# Altium PCB PCB1.PcbDoc
Units mm, origin at the board's own origin, x right, y up, seen from the top; angles counter-clockwise.
Board outline 33.4 x 93.22 mm, 2 copper layers (Top Layer, Bottom Layer); 31 components, 27 nets, 114 pads, 40 vias.
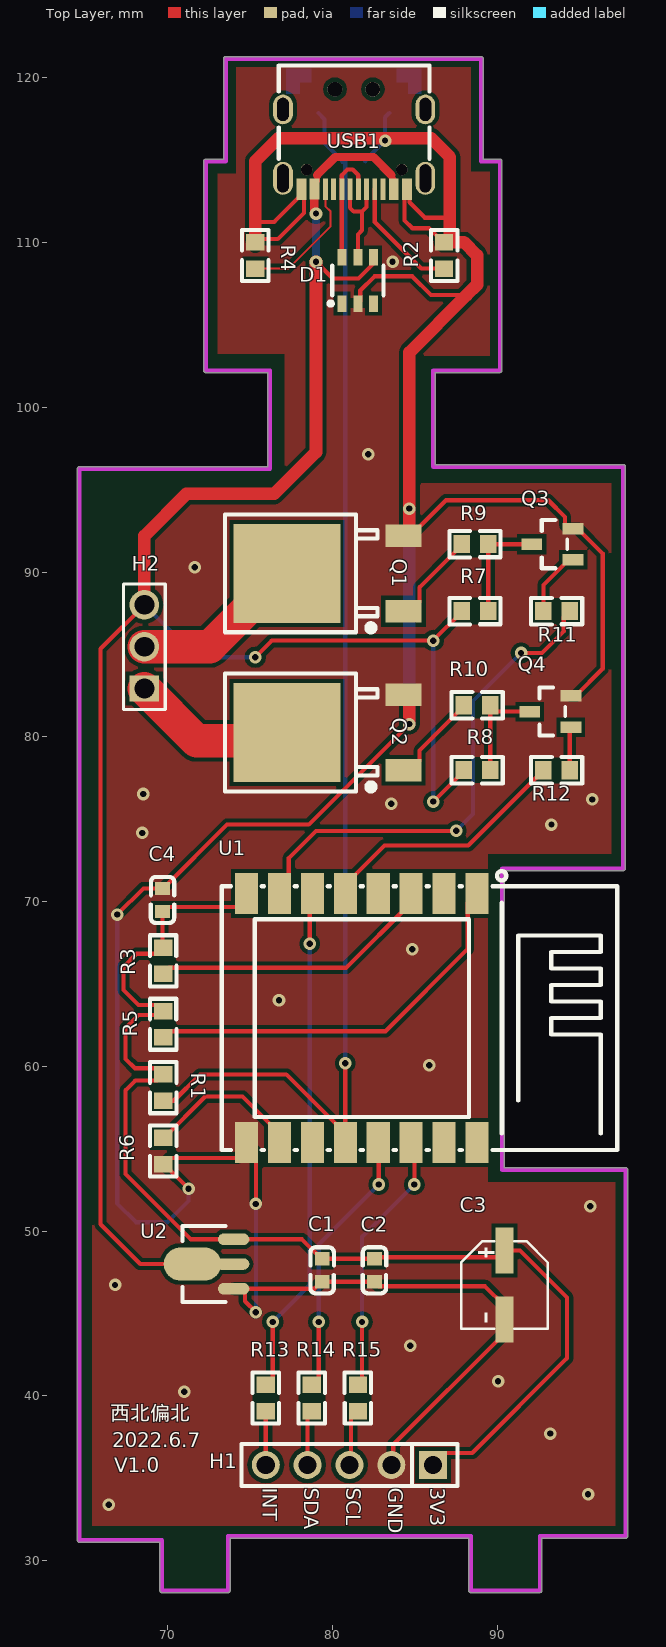
[diagram p0: Top Layer view]
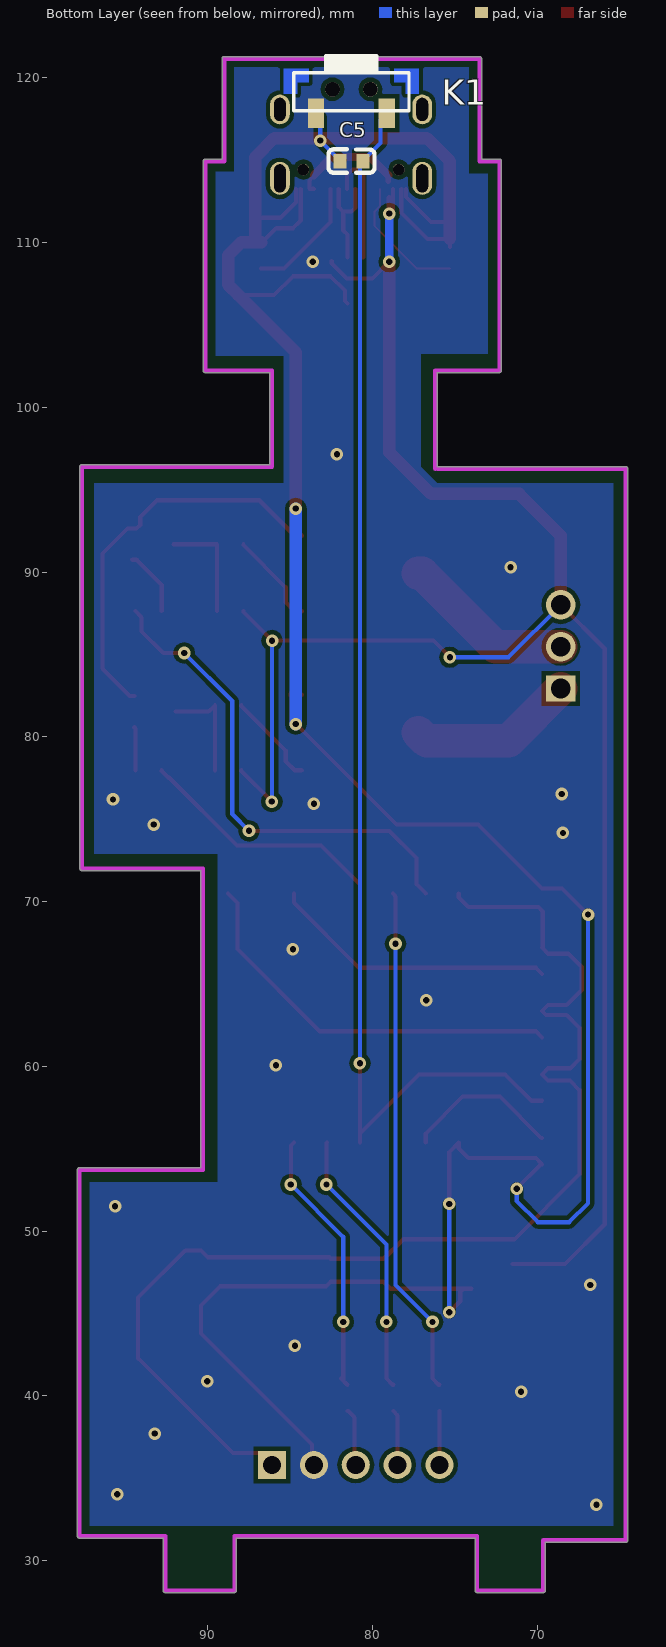
[diagram p1: Bottom Layer view, seen from below]
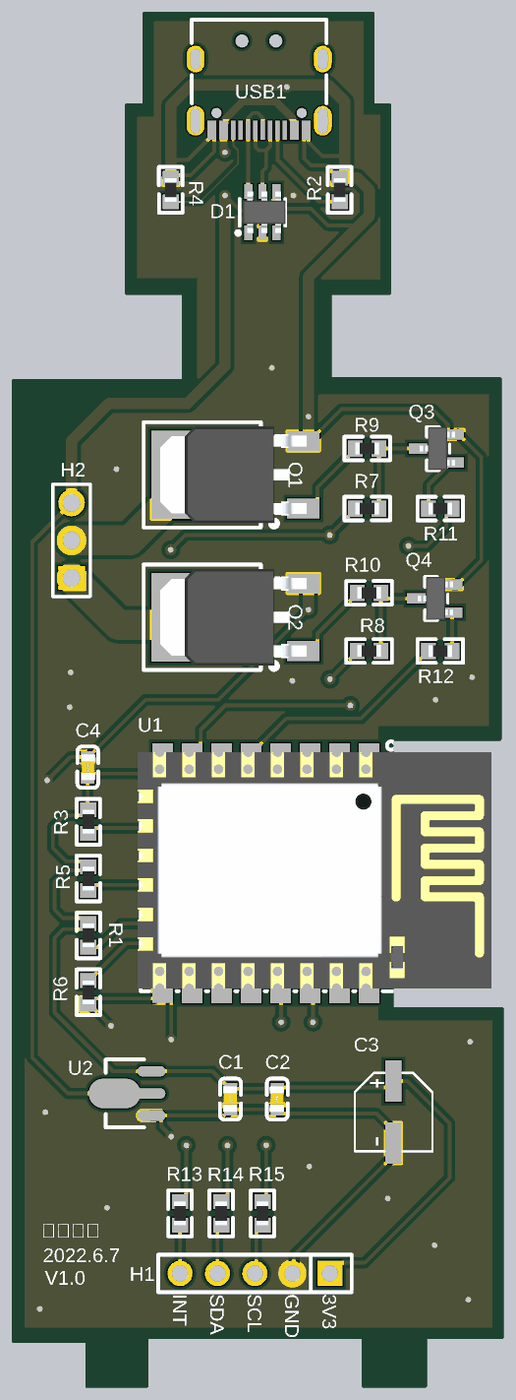
[diagram p2: 3D render of the assembled board from above, using the file's embedded part models]

## Layer stack, top to bottom
Top Solder: solder mask 0.0102, Solder Resist, Dk 3.5
Top Layer: signal copper 0.0356
Dielectric 1: dielectric 0.32, FR-4, Dk 4.8
Bottom Layer: signal copper 0.0356
Bottom Solder: solder mask 0.0102, Solder Resist, Dk 3.5

## Board outline
64.643,31.115 69.516,31.115 69.516,28.194 ccw(c69.643,28.194) 69.643,28.067 73.66,28.067 ccw(c73.66,28.194) 73.787,28.194 73.787,31.369 88.265,31.369 88.265,28.194 ccw(c88.392,28.194) 88.392,28.067 92.583,28.067 ccw(c92.583,28.194) 92.71,28.194 92.71,31.369 97.79,31.369 ccw(c97.79,31.496) 97.917,31.496 97.917,53.721 ccw(c97.79,53.721) 97.79,53.848 90.424,53.848 90.424,71.882 97.643,71.882 ccw(c97.643,72.009) 97.77,72.009 97.77,96.393 ccw(c97.643,96.393) 97.643,96.52 86.233,96.52 86.233,102.108 90.154,102.108 ccw(c90.154,102.235) 90.281,102.235 90.281,114.935 ccw(c90.154,114.935) 90.154,115.062 89.138,115.062 89.138,121.158 ccw(c89.011,121.158) 89.011,121.285 73.517,121.285 ccw(c73.517,121.158) 73.39,121.158 73.39,115.062 72.311,115.062 ccw(c72.311,114.935) 72.184,114.935 72.184,102.235 ccw(c72.311,102.235) 72.311,102.108 76.073,102.108 76.073,96.401 64.643,96.401 ccw(c64.643,96.274) 64.516,96.274 64.516,31.242 ccw(c64.643,31.242)

## Design rules (kind name [scope] priority, off if disabled: settings)
Clearance [All] p1: gap=0.254 ignorepadtopadclearanceinfootprint=FALSE except(0: Arc-Hole Track-Hole SMDPad-Hole THPad-Hole Via-Hole Fill-Hole Poly-Hole Region-Hole Text-Hole)
PolygonConnect [All] p1: connectstyle=Direct reliefconductorwidth=0.254 reliefentries=4 polygonreliefangle="90 Angle" airgapwidth=0.254
RoutingVias [All] p1: holewidth=0.381 width=0.635 viastyle="Through Hole" minholewidth=0.711 minwidth=1.27 maxholewidth=0.711 maxwidth=1.27
SolderMaskExpansion [All] p1: expansion=0.102
Width [All] p1: maxlimit=2.032 minlimit=0.127 preferedwidth=0.254
30 further rules are at their usual default settings.

## Components (designator, comment, footprint, x,y, rotation, side; value= is the part's Value field where it differs from the comment)
C1 "2.2u" C0603 79.375,47.625 r90 top
C2 "10u" C0603 82.55,47.625 r90 top
C3 "220uF" CAP-SMD_BD5.0-L5.3-W5.3-FD 90.424,46.736 r270 top
C4 "0.1u" C0603 69.674,70.104 r270 top
C5 "1u" C0603 81.28,114.935 r180 bottom
D1 "SRV05-4_C384887" SOT-23-6_L2.9-W1.6-P0.95-LS2.8-BR 81.534,107.696 r270 top
H1 "PAJ7620U2" HDR-TH_5P-P2.54-V-M 81.026,35.814 r180 top
H2 "OUTPUT" HDR-TH_3P-P2.54-V-M-1 68.58,85.471 r90 top
K1 "TS-1188E" "SMD SWITCH 7X3.6X2.7" 81.292,119.006 r0 bottom
Q1 "IRFR1205TRPBF" TO-252-2_L6.5-W6.1-P4.58-LS10.0-TR 80.772,89.916 r270 top
Q2 "IRFR1205TRPBF" TO-252-2_L6.5-W6.1-P4.58-LS10.0-TR 80.772,80.264 r270 top
Q3 "S8050" SOT-23(SOT-23-3) 93.345,91.694 r90 top
Q4 "S8050" SOT-23(SOT-23-3) 93.218,81.534 r90 top
R1 "10k" R0603 69.723,58.712 r270 top
R2 "5.1k" R0603 86.773,109.22 r270 top
R3 "10k" R0603 69.723,66.409 r90 top
R4 "5.1k" R0603 75.311,109.22 r90 top
R5 "10k" R0603 69.723,62.56 r90 top
R6 "10k" R0603 69.723,54.864 r270 top
R7 "5.1k" R0603 88.647,87.63 r180 top
R8 "5.1k" R0603 88.773,77.978 r180 top
R9 "1k" R0603 88.646,91.694 r0 top
R10 "1k" R0603 88.772,81.915 r0 top
R11 "100k" R0603 93.599,87.63 r180 top
R12 "100k" R0603 93.599,77.973 r0 top
R13 "22R" R0603 75.946,39.878 r90 top
R14 "22R" R0603 78.74,39.878 r90 top
R15 "22R" R0603 81.534,39.878 r90 top
U1 "ESP-12S" WIFIM-SMD_ESP-12F-ESP8266MOD 81.122,62.934 r180 top
U2 "HT7833" SOT-89_L4.5-W2.5-P1.50-LS4.2-BR 72.751,48.006 r0 top
USB1 "KH-TYPE-C-16P" USB-C-SMD_KH-TYPE-C-16P 81.311,115.662 r180 top

## Footprints (in the part's own frame and the unit in brackets; to place one, negate y for a bottom-side part, rotate by r counter-clockwise, add the part's x,y. Pads: shape width x height; smd on the part's side, far side on the other; paste and mask are expansions set on the pad)
C0603 [mm]
  rect 0.8x0.9 smd: 1(-0.7,0) 2(0.7,0)
  silkscreen extent -1.4,-0.7 1.4,0.72, body extent -0.88,-0.44 0.88,0.51, height 0.87
CAP-SMD_BD5.0-L5.3-W5.3-FD [mm]
  rect 2.8x1.1 smd: 1(-2.1,0) 2(2.1,0)
  silkscreen extent -2.66,-2.62 2.66,2.65
HDR-TH_3P-P2.54-V-M-1 [mm]
  rect 1.575x1.8 hole 1.2: 1(-2.54,0)
  round 1.8 hole 1.2: 2(0,0) 3(2.54,0)
  silkscreen extent -3.81,-1.27 3.81,1.27
HDR-TH_5P-P2.54-V-M [mm]
  rect 1.7x1.7 hole 1.1: 1(-5.08,0)
  round 1.7 hole 1.1: 2(-2.54,0) 3(0,0) 4(2.54,0) 5(5.08,0)
  silkscreen extent -6.56,-1.27 6.56,1.27
R0603 [mm]
  rect 1x1.1 smd: 1(-0.8,0) 2(0.8,0)
  silkscreen extent -1.55,-0.8 1.55,0.81, body extent -0.8,-0.4 0.8,0.4, height 0.55
"SMD SWITCH 7X3.6X2.7" [mm]
  rect 1x1.8 smd: 1(-2.149,1.15) 2(2.147,1.15)
  round 0 smd: S1(-3.365,-0.795) S2(3.363,-0.803)
  round 0.9 hole 0.9 unplated: ""(-1.151,-0.3) ""(1.151,-0.3)
  Top Layer region: 2.597,-0.735 3.298,-0.735 3.298,-0.034 4.098,-0.034 4.098,-1.535 2.597,-1.535
  Top Layer region: -3.298,-0.031 -3.298,-0.732 -2.597,-0.732 -2.597,-1.532 -4.099,-1.532 -4.099,-0.031
  silkscreen extent -3.5,-2.35 3.5,1
SOT-23(SOT-23-3) [mm]
  rect 0.7x1.25 smd: 1(-0.95,-1.25) 2(0.95,-1.25) 3(0,1.25)
  silkscreen extent -1.46,-0.9 1.46,0.65, body extent -1.45,-1.26 1.45,1.14, height 1.15
SOT-23-6_L2.9-W1.6-P0.95-LS2.8-BR [mm]
  rect 1x0.55 smd: 1(1.4,-0.95) 2(1.4,0) 3(1.4,0.95) 4(-1.4,0.95) 5(-1.4,0) 6(-1.4,-0.95)
  silkscreen extent -0.9,-1.78 1.52,1.55, body extent -1.4,-1.32 1.4,1.58, height 1.45
SOT-89_L4.5-W2.5-P1.50-LS4.2-BR [mm]
  oval 1.9x0.7 smd: 1(1.25,-1.5) 3(1.25,1.5)
  oval 3.5x2 smd: 2(-1.25,0)
  oval 2.1x0.7 smd: 2(1.151,0)
  silkscreen extent -1.85,-2.3 0.75,2.3
TO-252-2_L6.5-W6.1-P4.58-LS10.0-TR [mm]
  rect 1.35x2.2 smd: 1(2.29,3.533) 3(-2.29,3.533)
  rect 6x6.5 smd: 4(0,-3.533)
  silkscreen extent -3.57,-7.3 3.57,1.95, body extent -3.27,-6.16 3.27,3.75, height 2.51
USB-C-SMD_KH-TYPE-C-16P [mm]
  oval 1.2x2 hole 0.7 slot 1.7 at 90 deg: 1(-4.32,1.765) 2(4.32,1.765)
  oval 1.2x1.8 hole 0.7 slot 1.4 at 90 deg: 3(-4.32,-2.415) 4(4.32,-2.415)
  rect 0.3x1.3 smd: A1(-3.35,2.415) A4(-2.55,2.415) A5(-1.25,2.415) A6(-0.25,2.415) A7(0.25,2.415) A8(1.25,2.415) A9(2.55,2.415) A12(3.35,2.415) B1(3.05,2.415) B4(2.25,2.415) B5(1.75,2.415) B6(0.75,2.415) B7(-0.75,2.415) B8(-1.75,2.415) B9(-2.25,2.415) B12(-3.05,2.415)
  round 0.7 hole 0.7 unplated: ""(-2.89,1.235) ""(2.89,1.235)
  silkscreen extent -4.57,-5.08 4.57,0.57
WIFIM-SMD_ESP-12F-ESP8266MOD [mm]
  rect 1.4x2.5 smd: 1(-7.651,-7.551) 2(-5.651,-7.551) 3(-3.651,-7.551) 4(-1.651,-7.551) 5(0.349,-7.551) 6(2.349,-7.551) 7(4.349,-7.551) 8(6.349,-7.551) 9(6.349,7.549) 10(4.349,7.55) 11(2.349,7.551) 12(0.349,7.551) 13(-1.651,7.55) 14(-3.651,7.551) 15(-5.651,7.55) 16(-7.651,7.551)
  silkscreen extent -16.15,-8.92 7.85,8, body extent -15.94,-8.19 8.06,7.81, height 3

## Part data
C3: BOM_JLCPCB Part Class="Extended Part", BOM_Manufacturer=PANASONIC, BOM_Manufacturer Part=EEEFT0J221AR, BOM_Supplier=LCSC, BOM_Supplier Part=C336271, Contributor=LCSC, nameAlias=Capacitance, spicePre=C, spiceSymbolName=EEEFT0J221AR
D1: BOM_Manufacturer=Leiditech, BOM_Manufacturer Part=SRV05-4, BOM_Paste Type=expand, BOM_Supplier=LCSC, BOM_Supplier Part=C384887, Contributor=LCSC, spicePre=D, spiceSymbolName=SRV05-4_C384887
H1: library part KH-2.54PH180-1X5P-L11.5, BOM_JLCPCB Part Class="Extended Part", BOM_Manufacturer=kinghelm(金航标), BOM_Manufacturer Part=KH-2.54PH180-1X5P-L11.5, BOM_Supplier=LCSC, BOM_Supplier Part=C2932699, Contributor=LCSC, spicePre=H, spiceSymbolName=KH-2.54PH180-1X5P-L11.5
H2: library part 68000-103HLF, BOM_JLCPCB Part Class="Extended Part", BOM_Manufacturer="Amphenol ICC", BOM_Manufacturer Part=68000-103HLF, BOM_Supplier=LCSC, BOM_Supplier Part=C168677, Contributor=LCSC, spicePre=H, spiceSymbolName=68000-103HLF
K1: BOM_Manufacturer=ReliaPro, BOM_Manufacturer Part="3*6*3.5 Side press  High temperature", BOM_Supplier=LCSC, BOM_Supplier Part=C37327, catid=20, spicePre=K
Q1 Q2: BOM_JLCPCB Part Class="Extended Part", BOM_Manufacturer=Infineon, BOM_Manufacturer Part=IRFR1205TRPBF, BOM_Supplier=LCSC, BOM_Supplier Part=C81467, spicePre=Q, spiceSymbolName=IRFR1205TRPBF
Q3 Q4: BOM_LCSC Assembly=Yes, BOM_Manufacturer=Yenji, BOM_Manufacturer Part=S8050, BOM_Supplier=LCSC, BOM_Supplier Part=C139514, Contributor=LCSC, SMT Type=Extend, spicePre=Q
R1: BOM_Manufacturer="Vishay Intertech", BOM_Manufacturer Part=CRCW060310K0JNEA, BOM_Supplier=LCSC, BOM_Supplier Part=C169103, nameAlias=Value(Ω), spicePre=R, spiceSymbolName=Resistor
R3 R5 R6 R7 R8 R9 R10 R11 R12 R13 R14 R15: library part NC, Contributor=LCEDA_Lib, nameAlias=Value(Ω), spicePre=R, spiceSymbolName=R_0603_EU
U1: BOM_JLCPCB SMD=Yes, BOM_Manufacturer=Ai-Thinker, BOM_Manufacturer Part=ESP-12S, BOM_Supplier=LCSC, BOM_Supplier Part=C82898, Contributor=HalfSweet, SMT Type=Extend, spicePre=U, spiceSymbolName=ESP-12S
U2: BOM_JLCPCB SMD=Yes, BOM_Manufacturer=HOLTEK, BOM_Manufacturer Part=HT7833, BOM_Supplier=LCSC, BOM_Supplier Part=C50936, image=//image.lceda.cn/szlcsc/C50936.jpg, SMT Type=Extend, spicePre=U, spiceSymbolName=HT7833
USB1: BOM_Manufacturer="Shenzhen Kinghelm Elec", BOM_Manufacturer Part=KH-TYPE-C-16P, BOM_Supplier=LCSC, BOM_Supplier Part=C709357, Contributor=LCSC, spicePre=U, spiceSymbolName=KH-TYPE-C-16P
C1 C2 C4 C5: Contributor=LCEDA_Lib, nameAlias=Value(F), spicePre=C, spiceSymbolName=C_0603_EU
R2 R4: Contributor=LCEDA_Lib, nameAlias=Value(Ω), spicePre=R, spiceSymbolName=R_0603_EU

## Via types
v1: diameter 0.762, hole 0.381, Top Layer to Bottom Layer, tented both sides, 40 vias

## Nets (pads, with @x,y where several pads share a name; then routed paths per layer and width w, separated by ;. In a path a pad name is that pad's centre, name@x,y a point inside that pad or via, vN(x,y) a via of type N, cw(c..) or ccw(c..) an arc to the next point about the centre after c; other vN are vias at no path point)
+3V3: C1.2 C2.2 C3.1 C4.2 H1.1 R1.1 R3.2 R5.2 U1.8 U2.3 | length 75
  Top Layer w0.254: U1.8 74.773,70.25 74.2,69.677 69.947,69.677 C4.2 69.674,67.258 R3.2 69.35,66.836 68.106,66.836 67.31,66.04 67.31,64.643 68.22,63.733 69.35,63.733 R5.2 69.482,63.119 68.22,63.119 67.437,62.336 67.437,60.452 68.004,59.885 69.35,59.885 R1.1 69.35,59.139 68.029,59.139 67.437,58.547 67.437,53.467 71.398,49.506 U2.3 78.144,49.506 79.325,48.325 C1.2 C2.2 82.638,48.413 90.001,48.413 C3.1 91.372,48.836 94.234,45.974 94.234,42.291 88.48,36.537 86.829,36.537 H1.1
c: R12.1 U1.5 | length 15.5
  Top Layer w0.254: U1.5 80.773,71.035 83.144,73.406 88.232,73.406 92.376,77.55 92.426,77.55 92.799,77.923 R12.1
Cout: H2.1 Q2.4 | length 10.2
  Top Layer w2.032: H2.1 71.755,79.756 76.731,79.756 Q2.4
EN: R3.1 U1.3 | length 17.4
  Top Layer w0.254: R3.1 70.096,65.982 80.82,65.982 84.773,69.935 U1.3
GND: C1.1 C2.1 C3.2 C4.1 C5.1 D1.2 H1.2 K1.2 Q1.3 Q2.3 Q3.2 Q4.2 R2.1 R4.2 R6.2 U1.9 U2.1 USB1.A1 USB1.A12 USB1.B1 USB1.B12 | length 208.5
  Top Layer w0.254: v1(66.929,69.215) 68.518,70.804 C4.1 69.724,70.804 73.596,74.676 78.559,74.676 v1(84.661,80.778) ; v1(71.259,52.578) 69.773,54.064 R6.2 70.096,54.437 74.2,54.437 74.773,55.01 U1.9 75.346,54.812 v1(75.346,51.654) ; U2.1 U2.1@74.48,46.506 ; R4.2@75.311,109.728 R4.2 R4.2@75.311,110.236 ; 75.311,110.901 75.652,111.241 76.455,111.241 77.972,112.758 USB1.A12@77.972,113.247 ; v1(75.346,45.085) 74.686,45.745 74.686,46.3 U2.1@74.48,46.506 ; R4.2@75.547,110.206 76.678,110.206 78.261,111.789 USB1.B1 ; D1.2 81.682,106.444 81.682,107.082 82.55,107.95 84.836,107.95 85.979,106.807 88.141,106.807 ; H1.2 83.683,35.931 83.683,37.045 90.424,43.786 C3.2 90.424,45.486 89.258,46.652 82.823,46.652 C2.1 C1.1 79.325,46.925 78.906,46.506 U2.1@74.48,46.506 ; Q2.3 Q2.3@84.73,82.554 ; USB1.B12 84.361,111.346 84.836,110.871 85.852,110.871 R2.1@86.487,110.236 ; Q1.3@84.661,92.562 Q1.3 84.73,92.206 86.885,94.361 93.091,94.361 94.107,93.345 94.107,92.867 94.33,92.644 Q3.2 94.87,92.644 96.393,91.121 96.393,84.134 94.743,82.484 Q4.2 ; USB1.A1 84.661,112.443 85.598,111.506 86.868,111.506 87.122,111.252
  Top Layer w0.762: R4.2@75.311,110.236 75.311,110.901 75.311,114.935 76.708,116.332 85.979,116.332 87.122,115.189 87.122,111.252 R2.1@87.122,110.236 ; v1(84.661,80.778) 84.661,82.485 Q2.3@84.73,82.554 ; Q1.3@84.661,92.562 v1(84.661,93.853) 84.661,103.327 88.138,106.804 ; R2.1 87.973,110.02 88.773,109.22 88.773,107.439 88.141,106.807
  Bottom Layer w0.254: v1(66.929,69.215) 66.929,51.689 68.072,50.546 69.977,50.546 71.259,51.828 v1(71.259,52.578) ; v1(75.346,45.085) v1(75.346,51.654) ; C5.1 81.98,114.985 v1(83.185,116.19) 83.185,117.602 K1.2
  Bottom Layer w0.762: v1(84.661,80.778) v1(84.661,93.853)
  other v1: 66.421,33.401 95.504,34.036 93.218,37.719 70.993,40.259 90.043,40.894 84.715,43.053 66.802,46.736 95.631,51.505 85.87,60.071 76.75,64.008 84.836,67.11 68.453,74.168 93.281,74.676 83.566,75.946 95.758,76.2 68.518,76.531 71.628,90.297 82.169,97.155 83.641,108.839
GPIO15: R6.1 U1.10 | length 9.6
  Top Layer w0.254: R6.1 69.773,55.664 72.275,58.166 74.54,58.166 76.773,55.933 U1.10
INT: R13.2 U1.6 | length 30.8
  Top Layer w0.254: R13.2 75.996,40.678 76.369,41.051 v1@76.369,44.323 ; v1(78.613,67.437) 78.613,70.325 U1.6
  Bottom Layer w0.254: v1(76.369,44.492) 78.613,46.736 v1(78.613,67.437)
key: C5.2 K1.1 R1.2 U1.12 | length 76.6
  Top Layer w0.254: R1.2 70.358,57.912 71.958,59.512 77.193,59.512 U1.12@80.773,55.933 ; U1.12 U1.12@80.773,55.933 ; v1(80.773,60.198) U1.12@80.773,55.933
  Bottom Layer w0.254: K1.1 79.517,117.483 79.517,116.048 80.58,114.985 C5.2 C5.2@80.773,114.742 ; v1(80.773,60.198) C5.2@80.773,114.742 ; C5.2@80.773,115.038 C5.2@80.773,114.742
NetH1_3: H1.3 R15.1 | length 3.5
  Top Layer w0.254: H1.3 81.111,35.899 81.111,38.705 81.484,39.078 R15.1
NetH1_4: H1.4 R14.1 | length 3.4
  Top Layer w0.254: H1.4 78.486,38.824 R14.1
NetH1_5: H1.5 R13.1 | length 3.3
  Top Layer w0.254: H1.5 R13.1
NetQ1_1: Q1.1 R9.1 | length 5.8
  Top Layer w0.254: Q1.1 84.73,87.626 85.278,88.174 85.278,89.076 87.846,91.644 R9.1
NetQ2_1: Q2.1 R10.1 | length 5.7
  Top Layer w0.254: Q2.1 84.73,77.974 85.278,78.522 85.278,79.171 87.972,81.865 R10.1
NetQ3_1: Q3.1 R11.2 | length 4
  Top Layer w0.254: R11.2 92.799,89.223 94.32,90.744 Q3.1
NetQ3_3: Q3.3 R7.1 R9.2 | length 6.7
  Top Layer w0.254: R7.1 R9.2 Q3.3
NetQ4_1: Q4.1 R12.2 | length 2.6
  Top Layer w0.254: R12.2 94.399,80.515 Q4.1
NetQ4_3: Q4.3 R8.1 R10.2 | length 6.5
  Top Layer w0.254: R8.1 R10.2@89.572,81.907 ; R10.2 R10.2@89.572,81.907 ; Q4.3 89.945,81.534 R10.2@89.572,81.907
NetR2_2: R2.2 USB1.A5 | length 7.4
  Top Layer w0.254: USB1.A5 82.561,111.241 85.382,108.42 R2.2
NetR4_1: R4.1 USB1.B5 | length 8
  Top Layer w0.127: R4.1 77.305,108.42 79.883,110.998 79.883,111.887 79.561,112.209 USB1.B5
RST: R5.1 U1.1 | length 24.3
  Top Layer w0.254: R5.1 70.096,62.133 83.215,62.133 88.2,67.118 88.2,69.912 U1.1
SCL: R15.2 U1.14 | length 16.7
  Top Layer w0.254: v1(81.788,44.492) 81.788,40.932 R15.2 81.542,40.678 R15.2@81.915,41.051 ; U1.14 84.963,55.193 v1(84.963,52.832)
  Bottom Layer w0.254: v1(81.788,44.492) 81.788,49.657 v1(84.963,52.832)
SDA: R14.2 U1.13 | length 16.4
  Top Layer w0.254: R14.2 78.79,40.678 79.163,41.051 v1(79.163,44.492) ; U1.13 82.804,55.353 v1(82.804,52.832)
  Bottom Layer w0.254: v1(79.163,44.492) 79.163,49.191 v1(82.804,52.832)
USBD+: D1.6 USB1.A6 USB1.B6 | length 7.1
  Top Layer w0.254: D1.6 80.561,109.119 USB1.B6 80.561,114.089 80.899,114.427 81.223,114.427 81.561,114.089 USB1.A6
USBD-: D1.5 USB1.A7 USB1.B7 | length 6.3
  Top Layer w0.254: USB1.A7 81.061,112.106 81.28,111.887 81.788,111.887 ; D1.5 81.534,110.49 81.788,110.744 81.788,111.887 ; 82.053,112.16 82.053,112.152 ; USB1.B7 82.061,112.408 82.061,112.16 82.053,112.152 ; 81.788,111.887 82.053,112.152
VBUS: D1.4 H2.3 R7.2 R8.2 U2.2 USB1.A4 USB1.A9 USB1.B4 USB1.B9 | length 124.6
  Top Layer w0.254: H2.3 65.913,85.344 65.913,50.419 68.326,48.006 U2.2@71.501,48.006 ; v1(75.311,84.836) 76.314,85.839 v1(86.106,85.839) 87.847,87.58 R7.2 ; v1@78.761,111.739 USB1.A9 ; v1(78.994,108.839) 80.01,107.823 81.575,107.823 82.484,108.732 D1.4@82.484,108.871 ; USB1.B9 83.584,113.27 83.838,113.27 83.838,113.77 83.641,113.967 83.641,114.006 83.561,114.086 ; v1(86.118,76.073) 87.973,77.928 R8.2
  Top Layer w0.33: v1(78.994,111.76) USB1.B4@78.994,112.71 ; USB1.B4@79.061,113.732 79.061,114.086
  Top Layer w0.508: 79.061,114.086 80.164,115.189 82.484,115.189 83.561,114.086
  Top Layer w0.762: H2.3 68.58,92.202 71.12,94.742 76.454,94.742 78.994,97.282 v1(78.994,108.839)
  Bottom Layer w0.254: H2.3 71.755,84.836 v1(75.311,84.836) ; v1(86.106,85.839) 86.112,85.833 86.112,76.079 v1(86.118,76.073)
  Bottom Layer w0.508: v1(78.994,108.839) v1(78.994,111.76)
w: R11.1 U1.7 | length 30.2
  Top Layer w0.254: U1.7 77.346,71.058 77.346,72.647 78.994,74.295 v1(87.503,74.295) ; v1(91.44,85.09) 92.71,85.09 94.026,86.406 94.026,87.257 R11.1
  Bottom Layer w0.254: v1(87.503,74.295) 88.519,75.311 88.519,82.169 v1(91.44,85.09)
Wout: H2.2 Q1.4 | length 10.5
  Top Layer w2.032: H2.2 72.544,85.471 76.989,89.916 Q1.4
pads on no net: D1.1 D1.3 K1. K1.S1 K1.S2 U1.2 U1.4 U1.11 U1.15 U1.16 USB1. USB1.1 USB1.2 USB1.3 USB1.4 USB1.A8 USB1.B8

## Polygon pours and split planes (outlines as drawn)
GND on Top Layer (solid, pour order 10): 74.168,120.65 74.168,114.173 73.025,114.173 73.025,103.251 77.089,103.251 77.089,96.393 76.073,95.377 65.405,95.377 65.405,32.131 97.155,32.131 97.155,52.959 89.408,52.959 89.408,72.898 96.901,72.898 96.901,95.377 85.382,95.377 85.382,103.124 89.535,103.124 89.535,114.3 88.392,114.3 88.392,120.65
GND on Top Layer (solid, pour order 4): 73.901,114.046
GND on Bottom Layer (solid, pour order 8): 74.168,120.65 74.168,114.173 73.025,114.173 73.025,103.251 77.089,103.251 77.089,96.393 76.073,95.377 65.405,95.377 65.405,32.131 97.155,32.131 97.155,52.959 89.408,52.959 89.408,72.898 96.901,72.898 96.901,95.377 85.391,95.377 85.391,103.124 89.535,103.124 89.535,114.3 88.392,114.3 88.392,120.65

## Keep-outs
Keep-Out Layer:
  lines w0.254: 76.081,96.274 64.643,96.274 64.643,31.242 69.643,31.242 69.643,28.194 73.66,28.194 73.66,31.496 88.392,31.496 88.392,28.194 92.583,28.194 92.583,31.496 97.79,31.496 97.79,53.721 90.297,53.721 90.297,72.009 97.643,72.009 97.643,96.393 86.106,96.393 86.106,102.235 90.154,102.235 90.154,114.935 89.011,114.935 89.011,121.158 73.517,121.158 73.517,114.935 72.311,114.935 72.311,102.235 76.2,102.235 76.2,96.266

## Other copper
Top Layer:
  pour cut-out: 65.405,95.377 70.739,95.377 70.737,95.375 70.737,95.102 68.085,92.45 68.161,92.374 68.161,87.973 65.405,85.217
  pour cut-out: 82.885,115.685 85.711,115.685 86.339,115.056 86.339,114.777 85.169,114.777 84.946,114.554 83.833,114.554 82.855,115.533 82.855,115.654
  pour cut-out: 75.958,111.63 76.294,111.63 77.563,112.898 77.563,114.297 77.735,114.297 78.222,114.784 79.139,114.784 79.798,115.443 79.763,115.478 79.763,115.685 76.976,115.685 75.958,114.667
  pour cut-out: 76.294,112.522

## Silkscreen, mask and mechanical layers (free items; w line width, h text height)
Top Overlay:
  text "西北偏北" at 66.51,38.227 h1.52
  text "2022.6.7" at 66.637,36.576 h1.52
  text "V1.0" at 66.764,35.052 h1.52
  text "INT" at 75.45,34.417 h1.52 r270
  text "SDA" at 77.99,34.417 h1.52 r270
  text "SCL" at 80.53,34.417 h1.52 r270
  text "GND" at 83.07,34.417 h1.52 r270
  text "3V3" at 85.61,34.417 h1.52 r270